# Altium PCB ArrayBoard.PcbDoc (part 1 of 2)
Units mm, origin at the board's own origin, x right, y up, seen from the top; angles counter-clockwise.
Board outline 84 x 84 mm, 4 copper layers (Top Copper, GND, VS, Bottom Copper), stack 1.97 mm thick; 132 components, 130 nets, 568 pads, 280 vias.
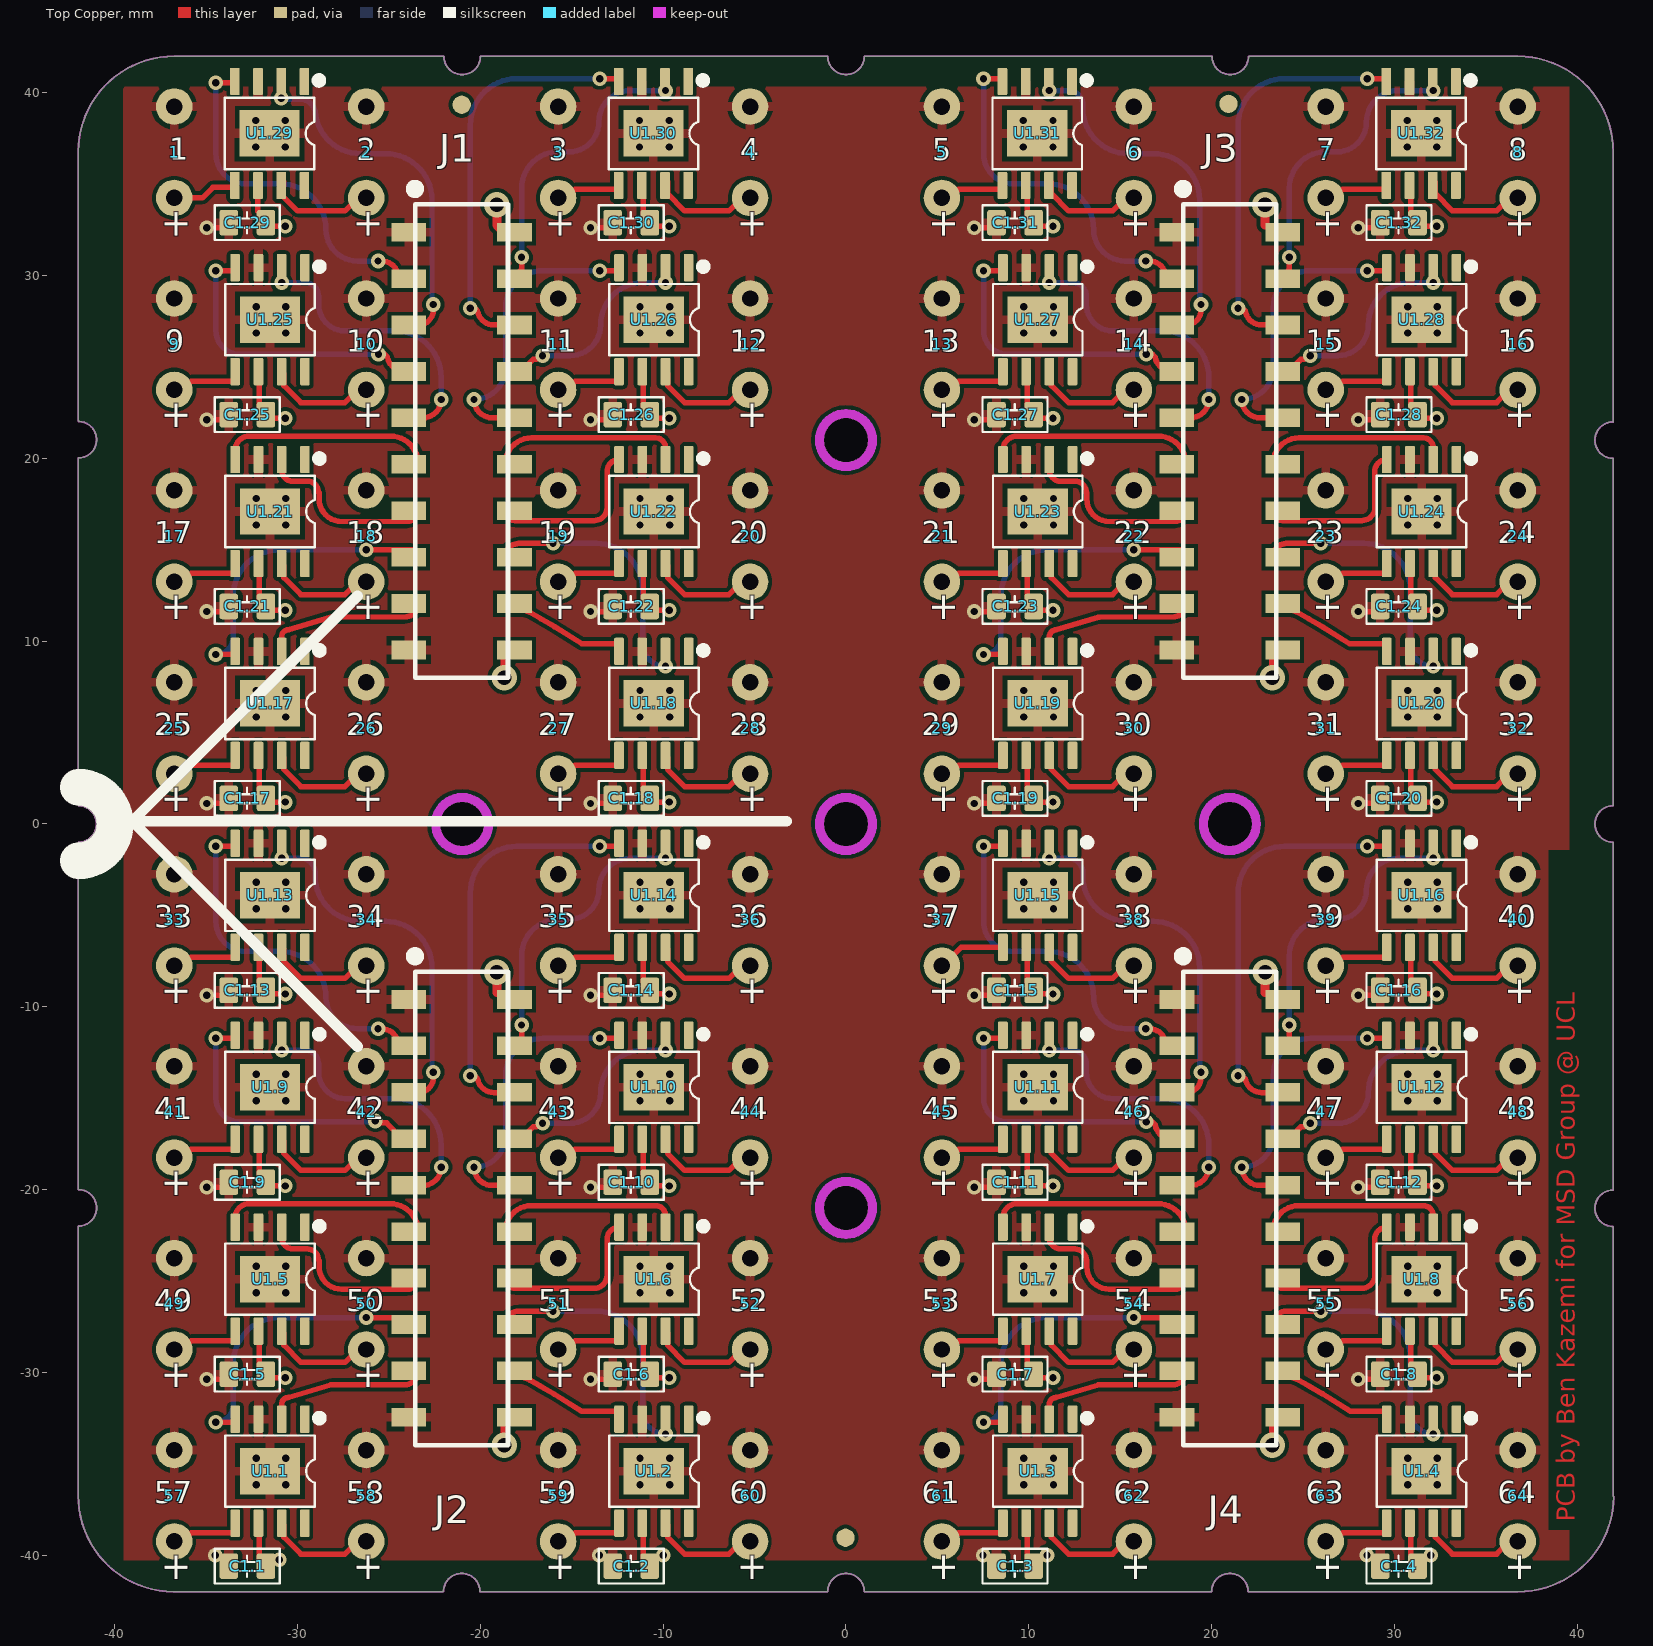
[diagram p0: Top Copper view]
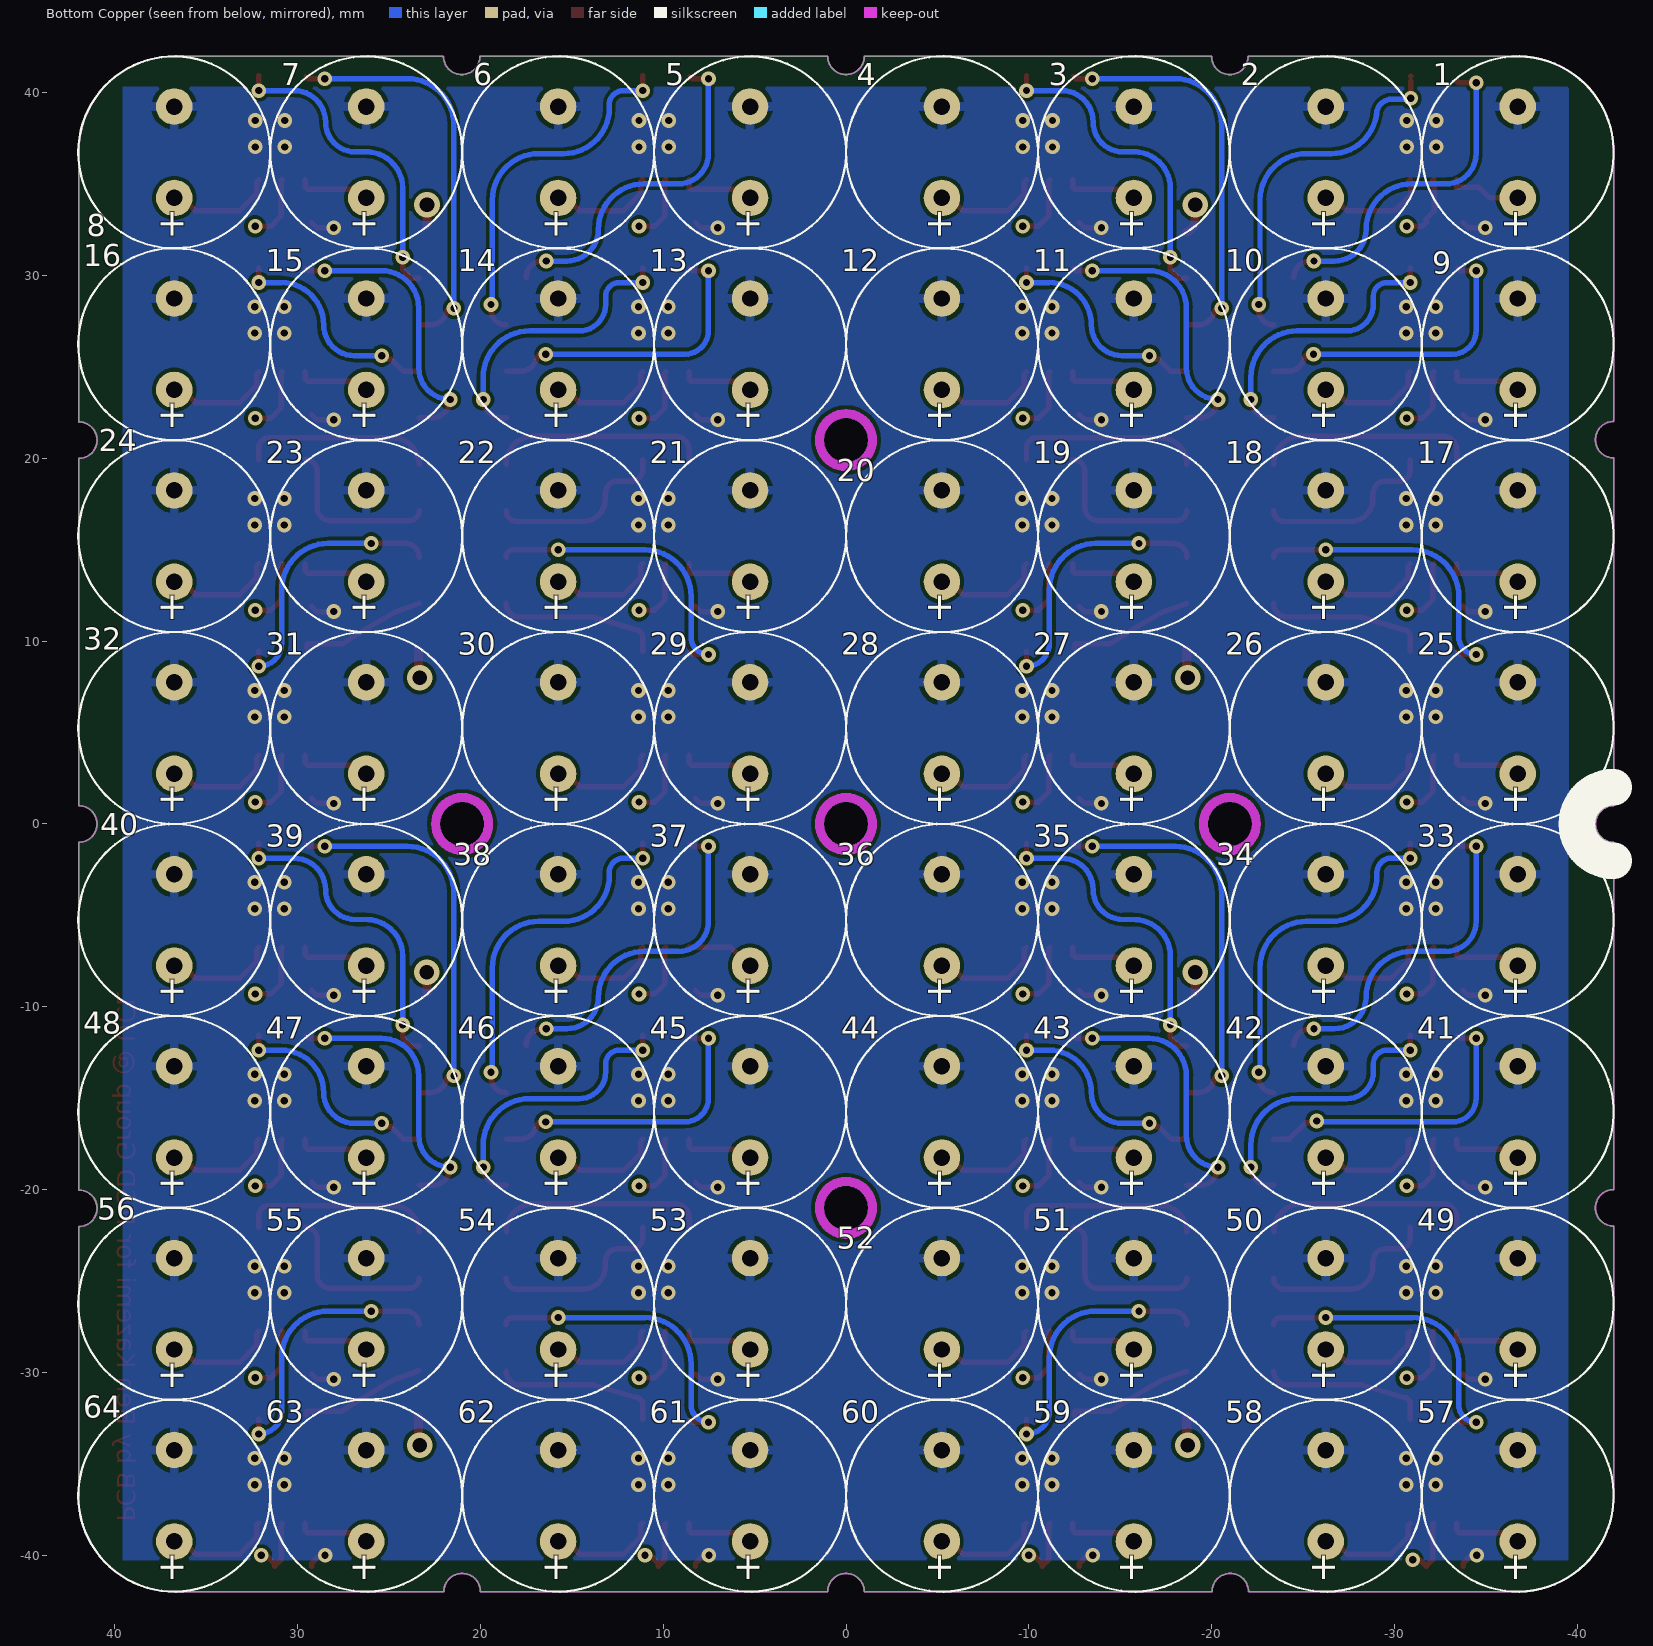
[diagram p1: Bottom Copper view, seen from below]
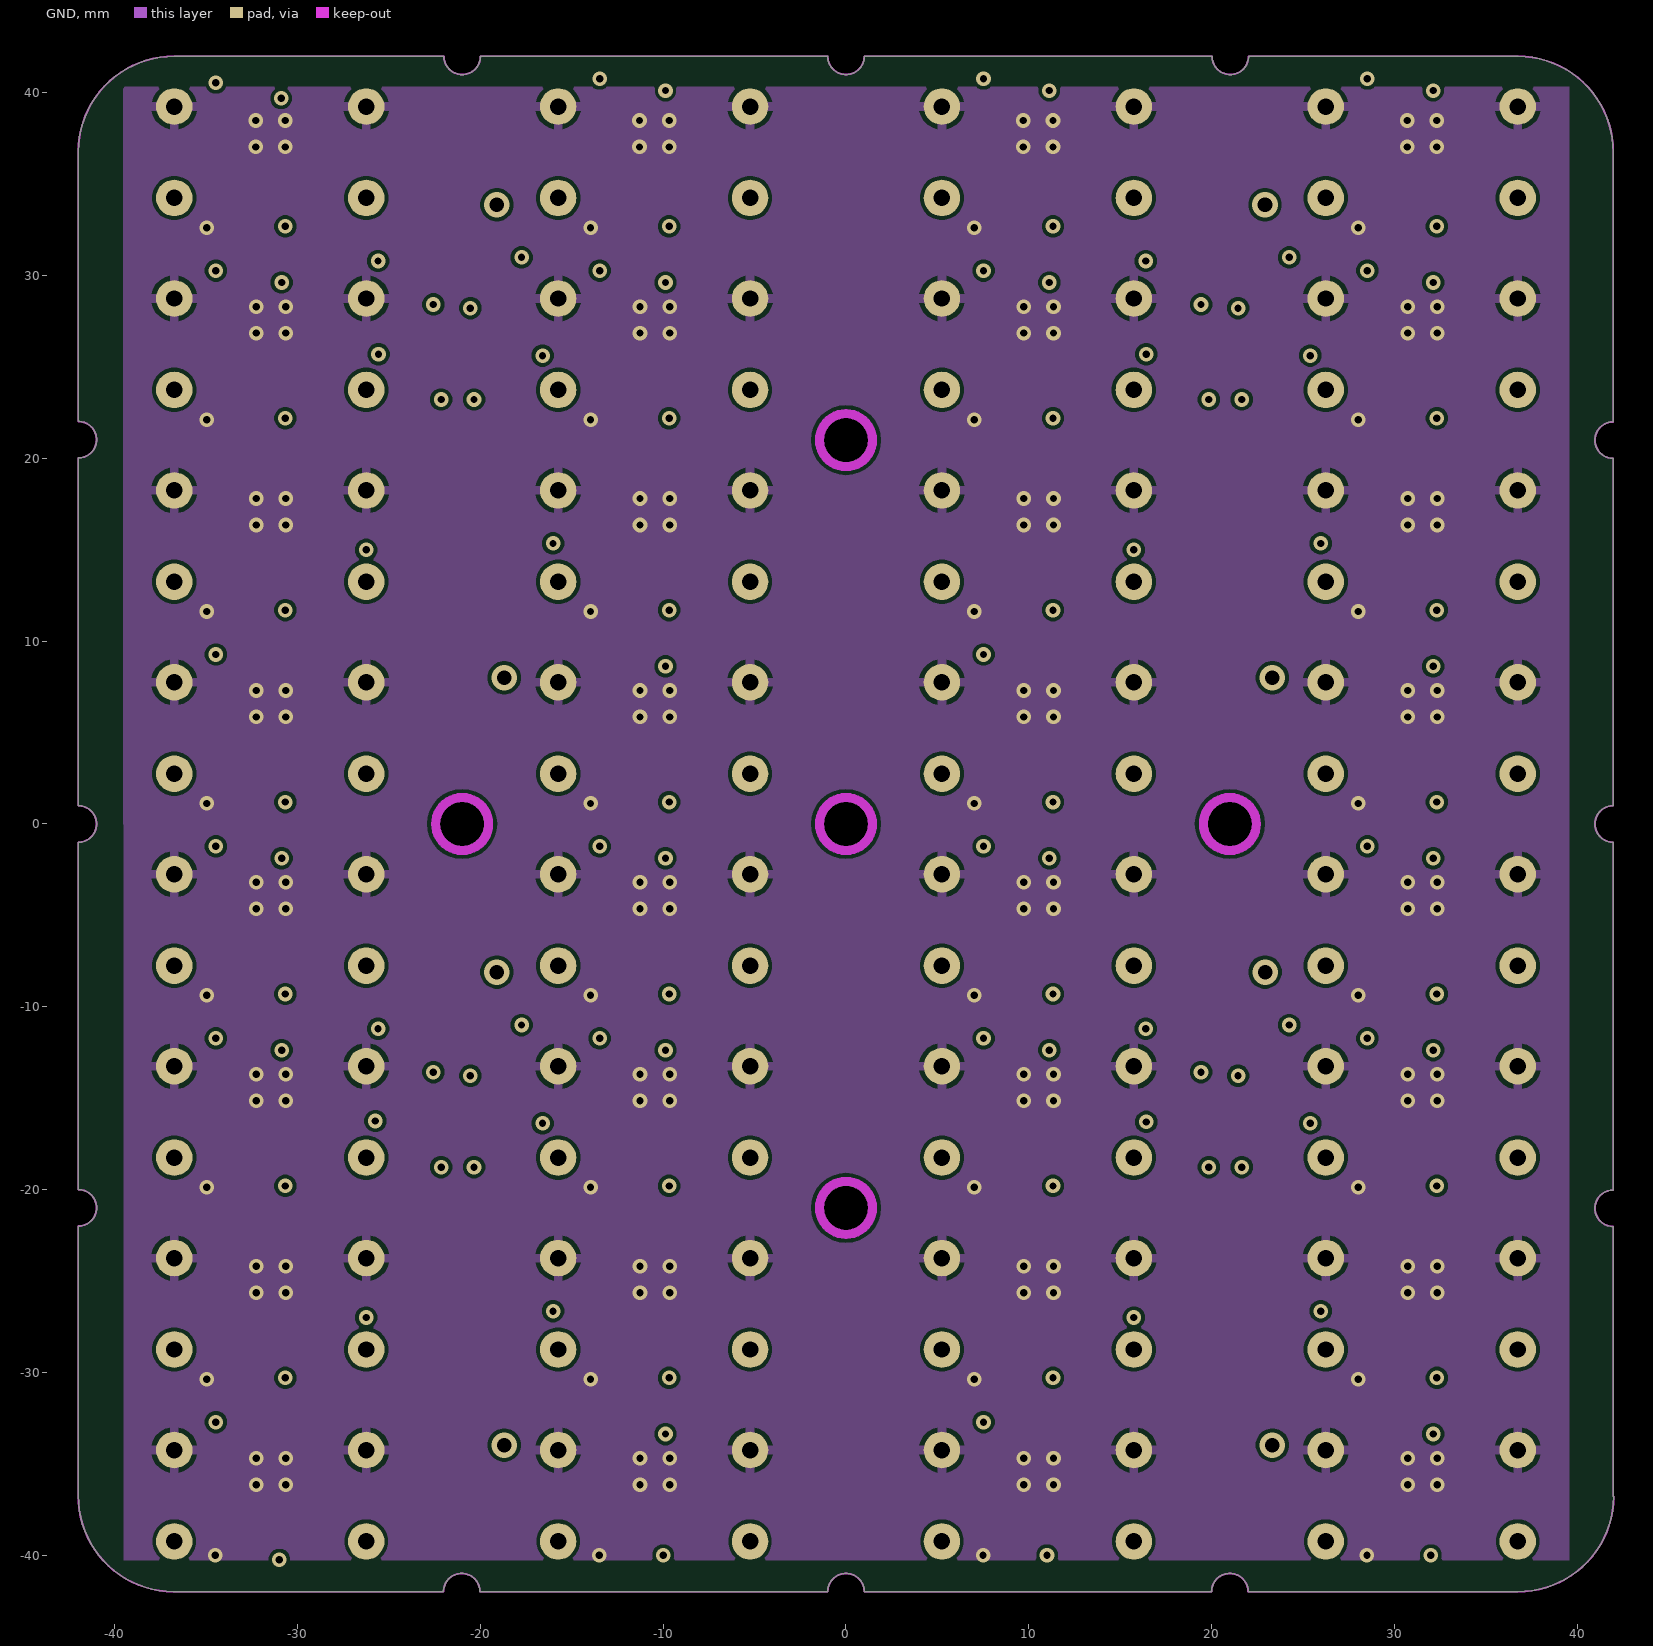
[diagram p2: GND]
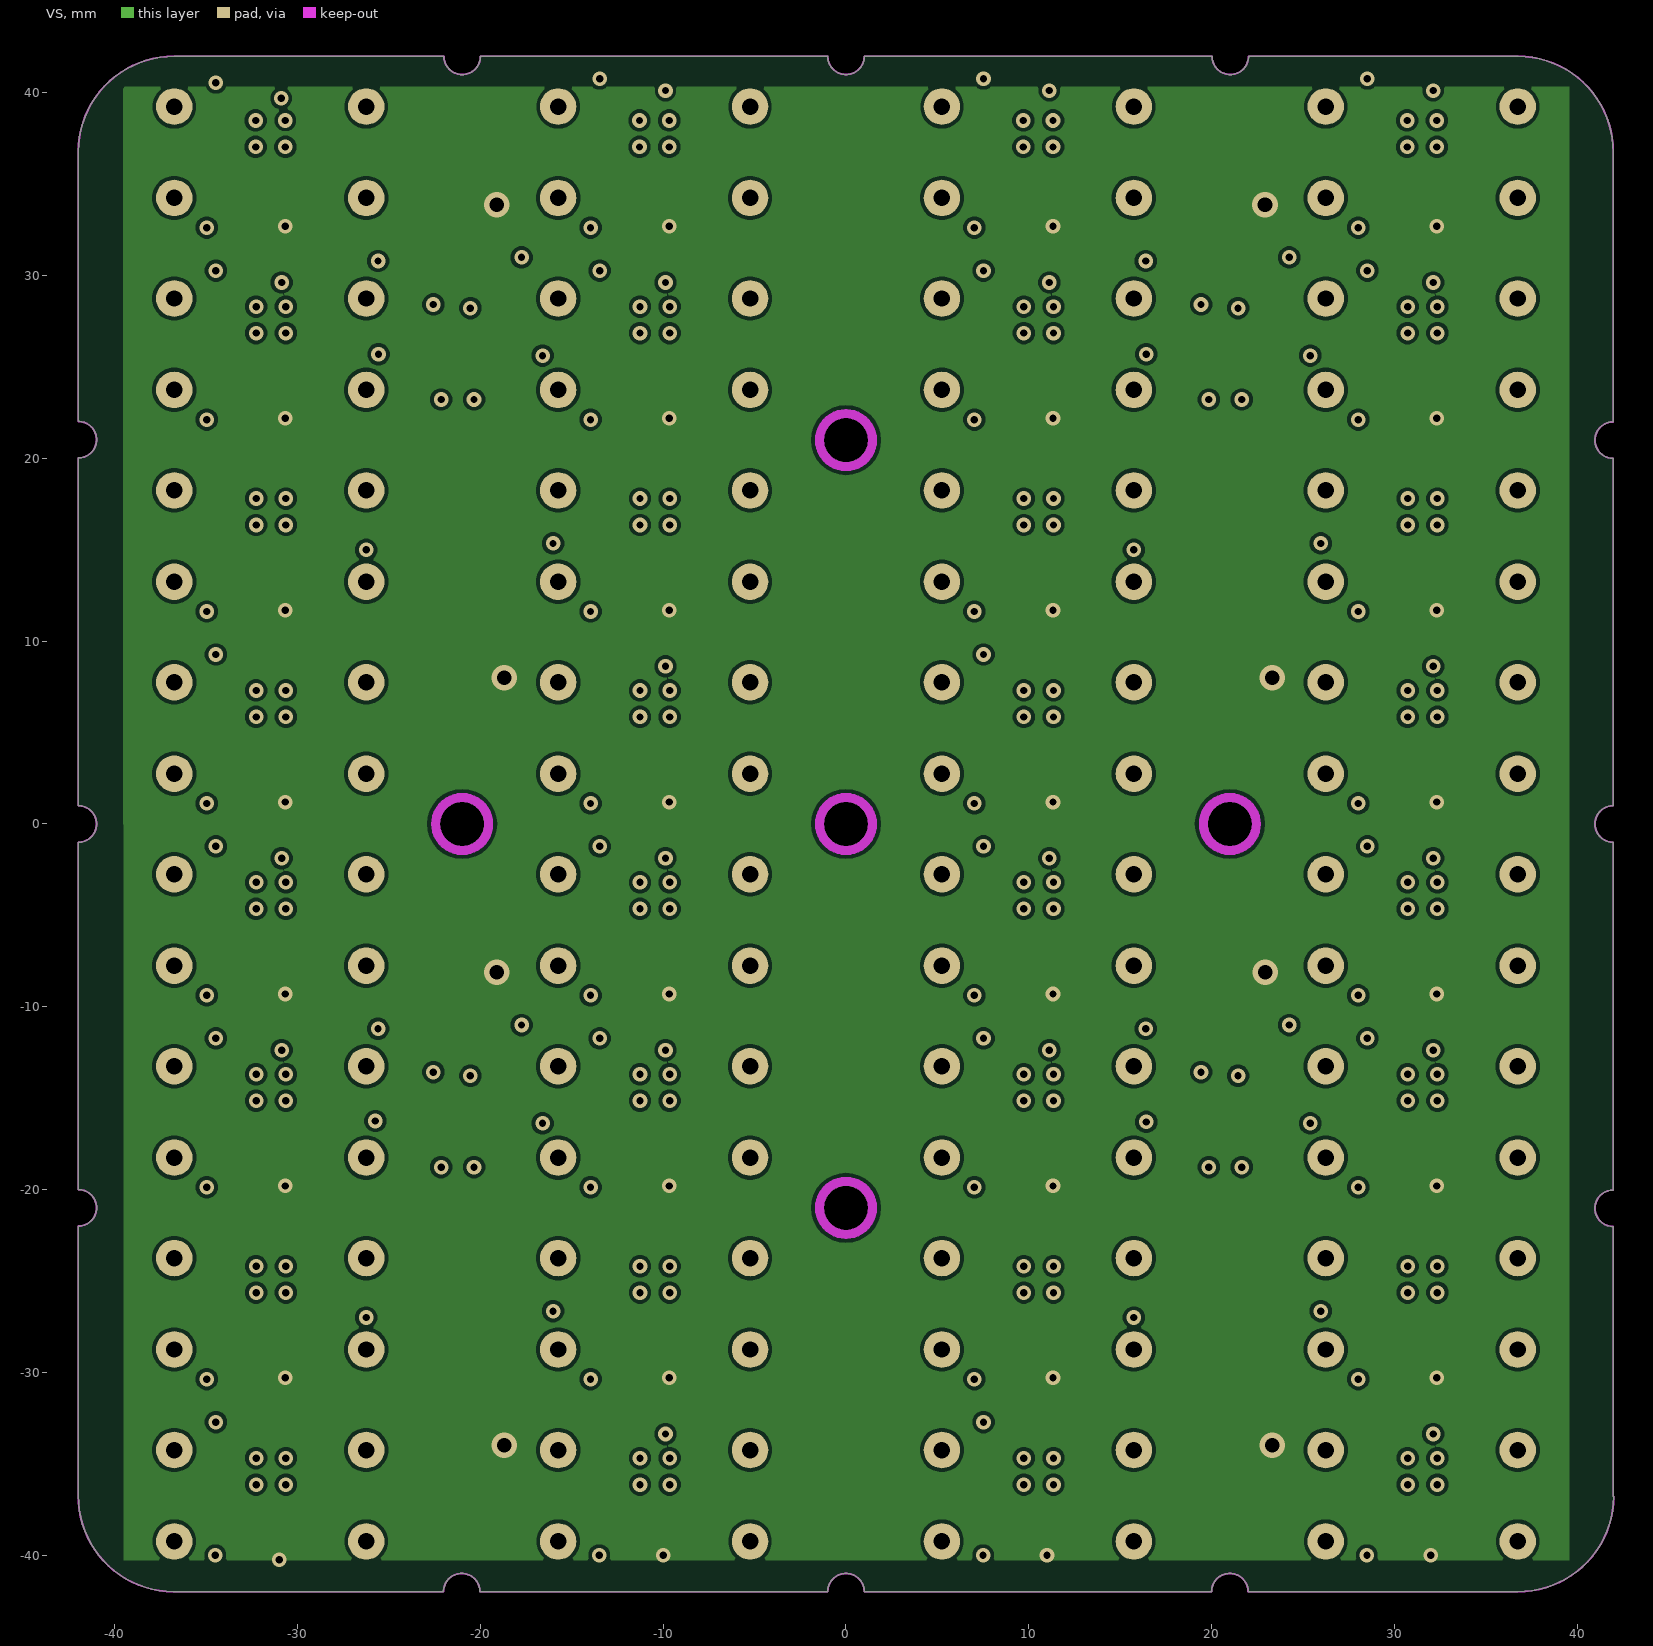
[diagram p3: VS]
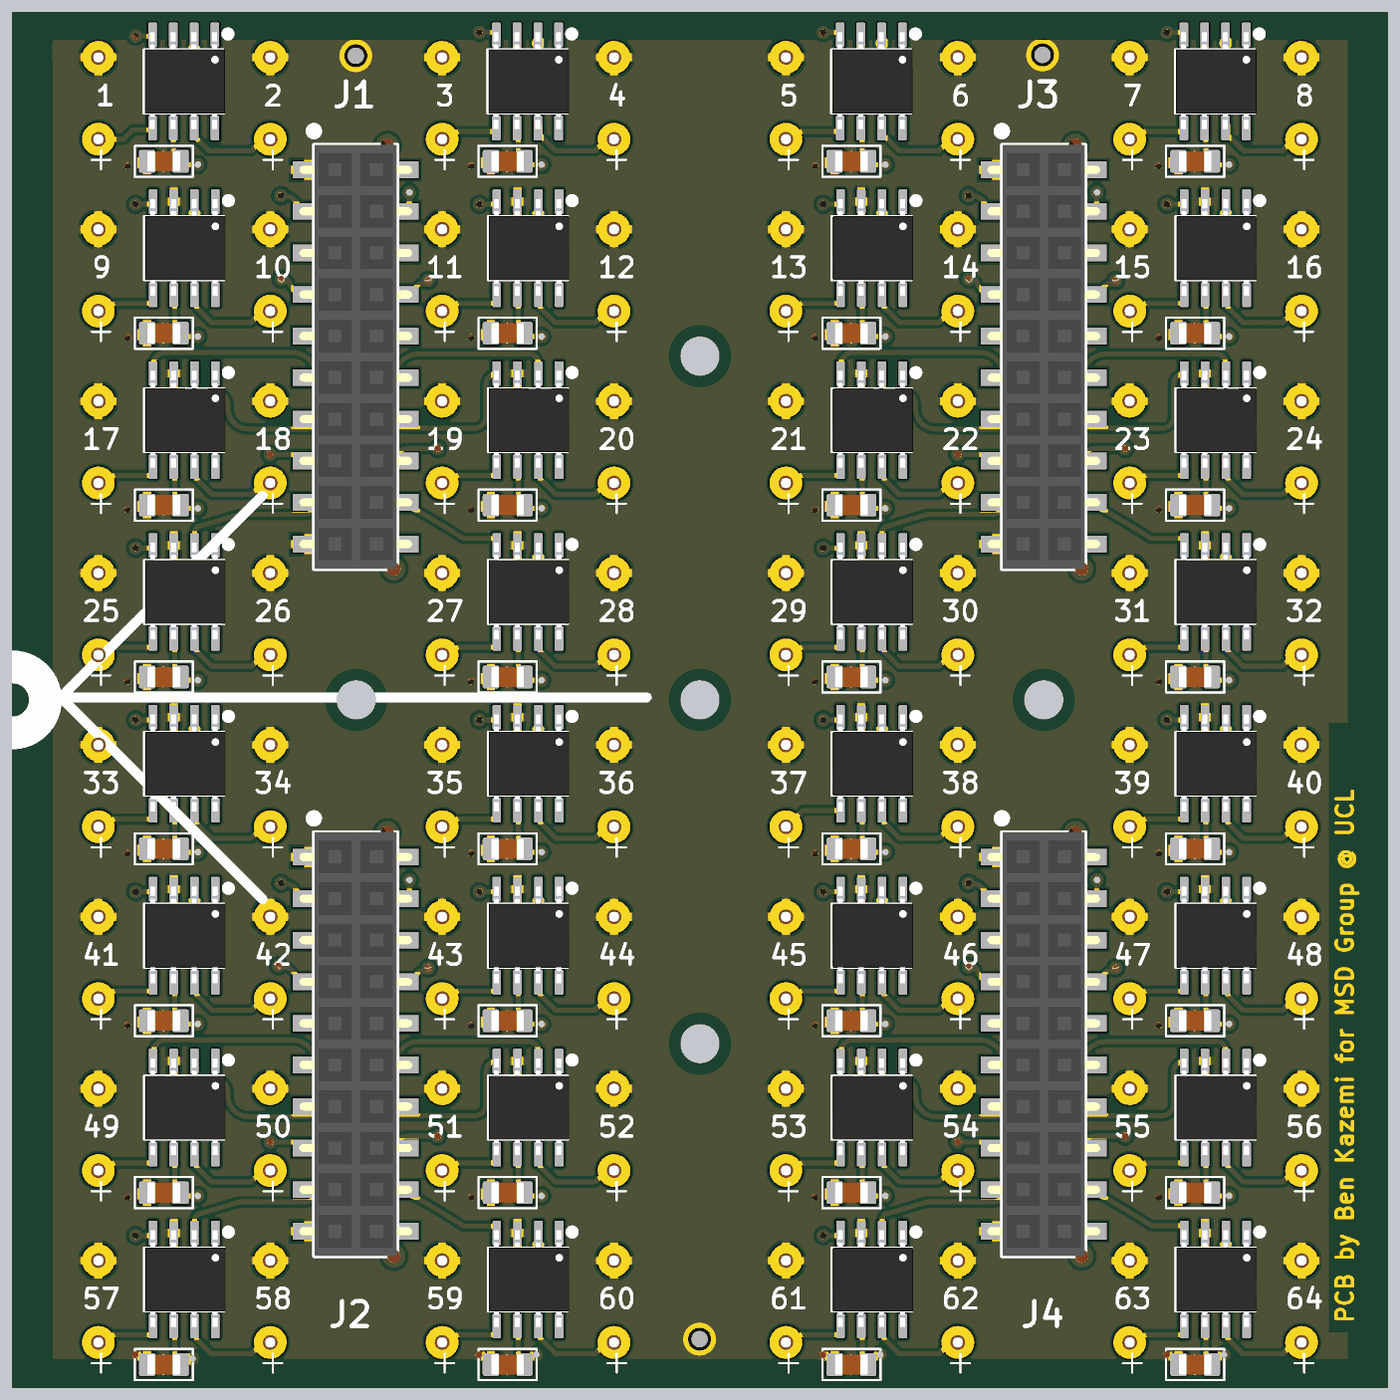
[diagram p5: 3D render of the assembled board from above, using the file's embedded part models]

## Layer stack, top to bottom
Top Mask: solder mask 0.015, Solder Resist, Dk 3.8
Top Copper: signal copper 0.035
Dielectric 1: prepreg 0.2, 7628, Dk 4.6
GND: signal copper 0.0175
Core: core 1.465, FR-4, Dk 4.5
VS: signal copper 0.0175
Dielectric 2: prepreg 0.2, 7628, Dk 4.6
Bottom Copper: signal copper 0.035
Bottom Mask: solder mask 0.015, Solder Resist, Dk 3.8

## Board outline
-42,-36.75 ccw(c-36.775,-36.775) -36.8,-42 -36.775,-42 -22.025,-42 cw(c-21.025,-42) -20.025,-42 -1,-42 cw(c0,-42) 1,-42 20,-42 cw(c21,-42) 22,-42 36.75,-42 ccw(c36.775,-36.775) 42,-36.8 41.975,-36.775 41.975,-22.025 cw(c41.975,-21.025) 41.975,-20.025 41.975,-1 cw(c41.975,0) 41.975,1 41.975,20 cw(c41.975,21) 41.975,22 41.975,36.75 ccw(c36.75,36.775) 36.775,42 22.025,42 cw(c21.025,42) 20.025,42 1,42 cw(c0,42) -1,42 -20,42 cw(c-21,42) -22,42 -36.75,42 ccw(c-36.775,36.775) -42,36.8 -42,36.775 -42,22.025 cw(c-42,21.025) -42,20.025 -42,1 cw(c-42,0) -42,-1 -42,-20 cw(c-42,-21) -42,-22

## Design rules (kind name [scope] priority, off if disabled: settings)
BoardOutlineClearance [All] p1: gap=0.2 ignorepadtopadclearanceinfootprint=FALSE
Clearance [All] p1: gap=0.2 ignorepadtopadclearanceinfootprint=FALSE except(0.09: Arc-Arc Arc-Track Track-Track; 0.127: SMDPad-SMDPad; 0.254: Arc-Via Arc-Text Track-Via Track-Text SMDPad-Via SMDPad-Text THPad-Via THPad-Text Via-Via Via-Text Fill-Text Poly-Text Region-Text Text-Text; 0.3: THPad-THPad; 0.33: Arc-THPad Track-THPad SMDPad-THPad)
HoleSize [All] p1: absolutevalues=TRUE maxlimit=6.3 minlimit=0.2 maxpercent=80.000 minpercent=20.000
MinimumAnnularRing [All] p1: minimumring=0.2
PlaneClearance [All] p1: clearance=0.5
PlaneConnect [All] p1: planeconnectstyle=Relief reliefexpansion=0.5 reliefentries=4 reliefconductorwidth=0.254 reliefairgap=0.254
PolygonConnect PolygonConnect_1 [All] p1: thpad.connectstyle=Relief thpad.reliefconductorwidth=0.5 thpad.reliefentries=4 thpad.polygonreliefangle="90 Angle" thpad.airgapwidth=0.254 smdpad.connectstyle=Relief smdpad.reliefconductorwidth=0.5 smdpad.reliefentries=4 smdpad.polygonreliefangle="90 Angle" smdpad.airgapwidth=0.254 via.connectstyle=Direct via.reliefconductorwidth=0.508 via.reliefentries=4 via.polygonreliefangle="90 Angle" via.airgapwidth=0.254
RoutingCorners [All] p1: cornerstyle=Round minsetback=2.54 maxsetback=2.54
RoutingVias [All] p1: holewidth=0.5 width=1 viastyle="Through Hole" minholewidth=0.2 minwidth=0.45 maxholewidth=1 maxwidth=2
SilkToSilkClearance [All] p1 off: silktosilkclearance=0.1
SilkToSolderMaskClearance [IsPad] p1 off: minsilkscreentomaskgap=0.1 clearancetoexposedcopper=TRUE
SolderMaskExpansion [All] p1: expansion=0.1 istentingtop=FALSE
Width [All] p1: maxlimit=2.54 minlimit=0.09 preferedwidth=0.3
24 further rules are at their usual default settings.

## Classes and differential pairs
net class J3_Nets: GND NetP3_20 sigA19 sigA20 sigA23 sigA24 sigA27 sigA28 sigA31 sigA32 sigB19 sigB20 sigB23 sigB24 sigB27 sigB28 sigB31 sigB32 VS
net class J1_Nets: GND NetP1_11 NetP1_20 sigA17 sigA18 sigA21 sigA22 sigA25 sigA26 sigA29 sigA30 sigB17 sigB18 sigB21 sigB22 sigB25 sigB26 sigB29 sigB30 VS
net class C1.32_Nets: GND VS
net class C1.31_Nets: GND VS
net class C1.30_Nets: GND VS
net class C1.29_Nets: GND VS
net class C1.28_Nets: GND VS
net class C1.27_Nets: GND VS
net class C1.26_Nets: GND VS
net class C1.25_Nets: GND VS
net class C1.24_Nets: GND VS
net class C1.23_Nets: GND VS
net class C1.22_Nets: GND VS
net class C1.21_Nets: GND VS
net class C1.20_Nets: GND VS
net class C1.19_Nets: GND VS
net class C1.18_Nets: GND VS
net class C1.17_Nets: GND VS
net class C1.16_Nets: GND VS
net class C1.15_Nets: GND VS
net class C1.14_Nets: GND VS
net class C1.13_Nets: GND VS
net class C1.10_Nets: GND VS
net class C1.9_Nets: GND VS
net class C1.8_Nets: GND VS
net class C1.7_Nets: GND VS
net class C1.6_Nets: GND VS
net class C1.5_Nets: GND VS
net class C1.4_Nets: GND VS
net class C1.3_Nets: GND VS
net class C1.2_Nets: GND VS
net class C1.1_Nets: GND VS
net class 7_Nets: GND Out2.32
net class 5_Nets: GND Out2.31
net class 3_Nets: GND Out2.30
net class 1_Nets: GND Out2.29
net class 15_Nets: GND Out2.28
net class 13_Nets: GND Out2.27
net class 11_Nets: GND Out2.26
net class 9_Nets: GND Out2.25
net class 23_Nets: GND Out2.24
net class 21_Nets: GND Out2.23
net class 19_Nets: GND Out2.22
net class 17_Nets: GND Out2.21
net class 31_Nets: GND Out2.20
net class 29_Nets: GND Out2.19
net class 27_Nets: GND Out2.18
net class 25_Nets: GND Out2.17
net class 39_Nets: GND Out2.16
net class 37_Nets: GND Out2.15
net class 35_Nets: GND Out2.14
net class 33_Nets: GND Out2.13
net class 47_Nets: GND Out2.12
net class 45_Nets: GND Out2.11
net class 43_Nets: GND Out2.10
net class 41_Nets: GND Out2.9
net class 55_Nets: GND Out2.8
net class 53_Nets: GND Out2.7
net class 51_Nets: GND Out2.6
net class 49_Nets: GND Out2.5
net class 63_Nets: GND Out2.4
net class 61_Nets: GND Out2.3
net class 59_Nets: GND Out2.2
net class 57_Nets: GND Out2.1
net class 8_Nets: GND Out1.32
net class 6_Nets: GND Out1.31
net class 4_Nets: GND Out1.30
net class 2_Nets: GND Out1.29
net class 16_Nets: GND Out1.28
net class 14_Nets: GND Out1.27
net class 12_Nets: GND Out1.26
net class 10_Nets: GND Out1.25
net class 24_Nets: GND Out1.24
net class 22_Nets: GND Out1.23
net class 20_Nets: GND Out1.22
net class 18_Nets: GND Out1.21
net class 32_Nets: GND Out1.20
net class 30_Nets: GND Out1.19
net class 28_Nets: GND Out1.18
net class 26_Nets: GND Out1.17
net class 40_Nets: GND Out1.16
net class 38_Nets: GND Out1.15
net class 36_Nets: GND Out1.14
net class 34_Nets: GND Out1.13
net class 48_Nets: GND Out1.12
net class 46_Nets: GND Out1.11
net class 44_Nets: GND Out1.10
net class 42_Nets: GND Out1.9
net class 56_Nets: GND Out1.8
net class 54_Nets: GND Out1.7
net class 52_Nets: GND Out1.6
net class 50_Nets: GND Out1.5
net class 64_Nets: GND Out1.4
net class 62_Nets: GND Out1.3
net class 60_Nets: GND Out1.2
net class 58_Nets: GND Out1.1
net class C1.12_Nets: GND VS
net class C1.11_Nets: GND VS
net class U1.32_Nets: GND Out1.32 Out2.32 sigA32 sigB32 VS
net class U1.31_Nets: GND Out1.31 Out2.31 sigA31 sigB31 VS
net class U1.30_Nets: GND Out1.30 Out2.30 sigA30 sigB30 VS
net class U1.29_Nets: GND Out1.29 Out2.29 sigA29 sigB29 VS
net class U1.28_Nets: GND Out1.28 Out2.28 sigA28 sigB28 VS
net class U1.27_Nets: GND Out1.27 Out2.27 sigA27 sigB27 VS
net class U1.26_Nets: GND Out1.26 Out2.26 sigA26 sigB26 VS
net class U1.25_Nets: GND Out1.25 Out2.25 sigA25 sigB25 VS
net class U1.24_Nets: GND Out1.24 Out2.24 sigA24 sigB24 VS
net class U1.23_Nets: GND Out1.23 Out2.23 sigA23 sigB23 VS
net class U1.22_Nets: GND Out1.22 Out2.22 sigA22 sigB22 VS
net class U1.21_Nets: GND Out1.21 Out2.21 sigA21 sigB21 VS
net class U1.20_Nets: GND Out1.20 Out2.20 sigA20 sigB20 VS
net class U1.19_Nets: GND Out1.19 Out2.19 sigA19 sigB19 VS
net class U1.18_Nets: GND Out1.18 Out2.18 sigA18 sigB18 VS
net class U1.17_Nets: GND Out1.17 Out2.17 sigA17 sigB17 VS
net class U1.16_Nets: GND Out1.16 Out2.16 sigA16 sigB16 VS
net class U1.15_Nets: GND Out1.15 Out2.15 sigA15 sigB15 VS
net class U1.14_Nets: GND Out1.14 Out2.14 sigA14 sigB14 VS
net class U1.13_Nets: GND Out1.13 Out2.13 sigA13 sigB13 VS
net class U1.12_Nets: GND Out1.12 Out2.12 sigA12 sigB12 VS
net class U1.11_Nets: GND Out1.11 Out2.11 sigA11 sigB11 VS
net class U1.10_Nets: GND Out1.10 Out2.10 sigA10 sigB10 VS
net class U1.9_Nets: GND Out1.9 Out2.9 sigA9 sigB9 VS
net class U1.8_Nets: GND Out1.8 Out2.8 sigA8 sigB8 VS
net class U1.7_Nets: GND Out1.7 Out2.7 sigA7 sigB7 VS
net class U1.6_Nets: GND Out1.6 Out2.6 sigA6 sigB6 VS
net class U1.5_Nets: GND Out1.5 Out2.5 sigA5 sigB5 VS
net class U1.4_Nets: GND Out1.4 Out2.4 sigA4 sigB4 VS
net class U1.3_Nets: GND Out1.3 Out2.3 sigA3 sigB3 VS
net class U1.2_Nets: GND Out1.2 Out2.2 sigA2 sigB2 VS
net class U1.1_Nets: GND Out1.1 Out2.1 sigA1 sigB1 VS
net class J4_Nets: GND sigA3 sigA4 sigA7 sigA8 sigA11 sigA12 sigA15 sigA16 sigB3 sigB4 sigB7 sigB8 sigB11 sigB12 sigB15 sigB16 VS
net class J2_Nets: GND sigA1 sigA2 sigA5 sigA6 sigA9 sigA10 sigA13 sigA14 sigB1 sigB2 sigB5 sigB6 sigB9 sigB10 sigB13 sigB14 VS
channel class AmplifyEmit: 1 2 3 4 5 6 7 8 9 10 11 12 13 14 15 16 17 18 19 20 21 22 23 24 25 26 27 28 29 30 31 32
net class sigB[1..32]: sigB1 sigB2 sigB3 sigB4 sigB5 sigB6 sigB7 sigB8 sigB9 sigB10 sigB11 sigB12 sigB13 sigB14 sigB15 sigB16 sigB17 sigB18 sigB19 sigB20 sigB21 sigB22 sigB23 sigB24 sigB25 sigB26 sigB27 sigB28 sigB29 sigB30 sigB31 sigB32
net class sigA[1..32]: sigA1 sigA2 sigA3 sigA4 sigA5 sigA6 sigA7 sigA8 sigA9 sigA10 sigA11 sigA12 sigA13 sigA14 sigA15 sigA16 sigA17 sigA18 sigA19 sigA20 sigA21 sigA22 sigA23 sigA24 sigA25 sigA26 sigA27 sigA28 sigA29 sigA30 sigA31 sigA32
component class 32: 7 8 C1.32 U1.32
component class 31: 5 6 C1.31 U1.31
component class 30: 3 4 C1.30 U1.30
component class 29: 1 2 C1.29 U1.29
component class 28: 15 16 C1.28 U1.28
component class 27: 13 14 C1.27 U1.27
component class 26: 11 12 C1.26 U1.26
component class 25: 9 10 C1.25 U1.25
component class 24: 23 24 C1.24 U1.24
component class 23: 21 22 C1.23 U1.23
component class 22: 19 20 C1.22 U1.22
component class 21: 17 18 C1.21 U1.21
component class 20: 31 32 C1.20 U1.20
component class 19: 29 30 C1.19 U1.19
component class 18: 27 28 C1.18 U1.18
component class 17: 25 26 C1.17 U1.17
component class 16: 39 40 C1.16 U1.16
component class 15: 37 38 C1.15 U1.15
component class 14: 35 36 C1.14 U1.14
component class 13: 33 34 C1.13 U1.13
component class 12: 47 48 C1.12 U1.12
component class 11: 45 46 C1.11 U1.11
component class 10: 43 44 C1.10 U1.10
component class 9: 41 42 C1.9 U1.9
component class ToBreakout: Header? J1 J2 J3 J4
component class 8: 55 56 C1.8 C?_S8 U1.8 U?_S8
component class 7: 53 54 C1.7 C?_S7 U1.7 U?_S7
component class 6: 51 52 C1.6 C?_S6 U1.6 U?_S6
component class 5: 49 50 C1.5 C?_S5 U1.5 U?_S5
component class 4: 63 64 C1.4 C?_S4 U1.4 U?_S4
component class 3: 61 62 C1.3 C?_S3 U1.3 U?_S3
component class 2: 59 60 C1.2 C?_S2 U1.2 U?_S2
component class 1: 57 58 C1.1 C?_S1 U1.1 U?_S1

## Components (designator, comment, footprint, x,y, rotation, side; value= is the part's Value field where it differs from the comment)
1 "EMIT" TRANSDUCER -36.75,36.75 r90 top (schematic designator 2)
2 "EMIT" TRANSDUCER -26.25,36.75 r90 top (schematic designator 1)
3 "EMIT" TRANSDUCER -15.75,36.75 r90 top (schematic designator 2)
4 "EMIT" TRANSDUCER -5.25,36.75 r90 top (schematic designator 1)
5 "EMIT" TRANSDUCER 5.25,36.75 r90 top (schematic designator 2)
6 "EMIT" TRANSDUCER 15.75,36.75 r90 top (schematic designator 1)
7 "EMIT" TRANSDUCER 26.25,36.75 r90 top (schematic designator 2)
8 "EMIT" TRANSDUCER 36.75,36.75 r90 top (schematic designator 1)
9 "EMIT" TRANSDUCER -36.75,26.25 r90 top (schematic designator 2)
10 "EMIT" TRANSDUCER -26.25,26.25 r90 top (schematic designator 1)
11 "EMIT" TRANSDUCER -15.75,26.25 r90 top (schematic designator 2)
12 "EMIT" TRANSDUCER -5.25,26.25 r90 top (schematic designator 1)
13 "EMIT" TRANSDUCER 5.25,26.25 r90 top (schematic designator 2)
14 "EMIT" TRANSDUCER 15.75,26.25 r90 top (schematic designator 1)
15 "EMIT" TRANSDUCER 26.25,26.25 r90 top (schematic designator 2)
16 "EMIT" TRANSDUCER 36.75,26.25 r90 top (schematic designator 1)
17 "EMIT" TRANSDUCER -36.75,15.75 r90 top (schematic designator 2)
18 "EMIT" TRANSDUCER -26.25,15.75 r90 top (schematic designator 1)
19 "EMIT" TRANSDUCER -15.75,15.75 r90 top (schematic designator 2)
20 "EMIT" TRANSDUCER -5.25,15.75 r90 top (schematic designator 1)
21 "EMIT" TRANSDUCER 5.25,15.75 r90 top (schematic designator 2)
22 "EMIT" TRANSDUCER 15.75,15.75 r90 top (schematic designator 1)
23 "EMIT" TRANSDUCER 26.25,15.75 r90 top (schematic designator 2)
24 "EMIT" TRANSDUCER 36.75,15.75 r90 top (schematic designator 1)
25 "EMIT" TRANSDUCER -36.75,5.25 r90 top (schematic designator 2)
26 "EMIT" TRANSDUCER -26.25,5.25 r90 top (schematic designator 1)
27 "EMIT" TRANSDUCER -15.75,5.25 r90 top (schematic designator 2)
28 "EMIT" TRANSDUCER -5.25,5.25 r90 top (schematic designator 1)
29 "EMIT" TRANSDUCER 5.25,5.25 r90 top (schematic designator 2)
30 "EMIT" TRANSDUCER 15.75,5.25 r90 top (schematic designator 1)
31 "EMIT" TRANSDUCER 26.25,5.25 r90 top (schematic designator 2)
32 "EMIT" TRANSDUCER 36.75,5.25 r90 top (schematic designator 1)
33 "EMIT" TRANSDUCER -36.75,-5.25 r90 top (schematic designator 2)
34 "EMIT" TRANSDUCER -26.25,-5.25 r90 top (schematic designator 1)
35 "EMIT" TRANSDUCER -15.75,-5.25 r90 top (schematic designator 2)
36 "EMIT" TRANSDUCER -5.25,-5.25 r90 top (schematic designator 1)
37 "EMIT" TRANSDUCER 5.25,-5.25 r90 top (schematic designator 2)
38 "EMIT" TRANSDUCER 15.75,-5.25 r90 top (schematic designator 1)
39 "EMIT" TRANSDUCER 26.25,-5.25 r90 top (schematic designator 2)
40 "EMIT" TRANSDUCER 36.75,-5.25 r90 top (schematic designator 1)
41 "EMIT" TRANSDUCER -36.75,-15.75 r90 top (schematic designator 2)
42 "EMIT" TRANSDUCER -26.25,-15.75 r90 top (schematic designator 1)
43 "EMIT" TRANSDUCER -15.75,-15.75 r90 top (schematic designator 2)
44 "EMIT" TRANSDUCER -5.25,-15.75 r90 top (schematic designator 1)
45 "EMIT" TRANSDUCER 5.25,-15.75 r90 top (schematic designator 2)
46 "EMIT" TRANSDUCER 15.75,-15.75 r90 top (schematic designator 1)
47 "EMIT" TRANSDUCER 26.25,-15.75 r90 top (schematic designator 2)
48 "EMIT" TRANSDUCER 36.75,-15.75 r90 top (schematic designator 1)
49 "EMIT" TRANSDUCER -36.75,-26.25 r90 top (schematic designator 2)
50 "EMIT" TRANSDUCER -26.25,-26.25 r90 top (schematic designator 1)
51 "EMIT" TRANSDUCER -15.75,-26.25 r90 top (schematic designator 2)
52 "EMIT" TRANSDUCER -5.25,-26.25 r90 top (schematic designator 1)
53 "EMIT" TRANSDUCER 5.25,-26.25 r90 top (schematic designator 2)
54 "EMIT" TRANSDUCER 15.75,-26.25 r90 top (schematic designator 1)
55 "EMIT" TRANSDUCER 26.25,-26.25 r90 top (schematic designator 2)
56 "EMIT" TRANSDUCER 36.75,-26.25 r90 top (schematic designator 1)
57 "EMIT" TRANSDUCER -36.75,-36.75 r90 top (schematic designator 2)
58 "EMIT" TRANSDUCER -26.25,-36.75 r90 top (schematic designator 1)
59 "EMIT" TRANSDUCER -15.75,-36.75 r90 top (schematic designator 2)
60 "EMIT" TRANSDUCER -5.25,-36.75 r90 top (schematic designator 1)
61 "EMIT" TRANSDUCER 5.25,-36.75 r90 top (schematic designator 2)
62 "EMIT" TRANSDUCER 15.75,-36.75 r90 top (schematic designator 1)
63 "EMIT" TRANSDUCER 26.25,-36.75 r90 top (schematic designator 2)
64 "EMIT" TRANSDUCER 36.75,-36.75 r90 top (schematic designator 1)
C1.1 "0.1 uF" "CAP0805 - CERAMIC" -32.75,-40.6 r270 top (schematic designator C1)
C1.2 "0.1 uF" "CAP0805 - CERAMIC" -11.75,-40.6 r270 top (schematic designator C1)
C1.3 "0.1 uF" "CAP0805 - CERAMIC" 9.25,-40.6 r270 top (schematic designator C1)
C1.4 "0.1 uF" "CAP0805 - CERAMIC" 30.25,-40.6 r270 top (schematic designator C1)
C1.5 "0.1 uF" "CAP0805 - CERAMIC" -32.75,-30.1 r270 top (schematic designator C1)
C1.6 "0.1 uF" "CAP0805 - CERAMIC" -11.75,-30.1 r270 top (schematic designator C1)
C1.7 "0.1 uF" "CAP0805 - CERAMIC" 9.25,-30.1 r270 top (schematic designator C1)
C1.8 "0.1 uF" "CAP0805 - CERAMIC" 30.25,-30.1 r270 top (schematic designator C1)
C1.9 "0.1 uF" "CAP0805 - CERAMIC" -32.75,-19.6 r270 top (schematic designator C1)
C1.10 "0.1 uF" "CAP0805 - CERAMIC" -11.75,-19.6 r270 top (schematic designator C1)
C1.11 "0.1 uF" "CAP0805 - CERAMIC" 9.25,-19.6 r270 top (schematic designator C1)
C1.12 "0.1 uF" "CAP0805 - CERAMIC" 30.25,-19.6 r270 top (schematic designator C1)
C1.13 "0.1 uF" "CAP0805 - CERAMIC" -32.75,-9.1 r270 top (schematic designator C1)
C1.14 "0.1 uF" "CAP0805 - CERAMIC" -11.75,-9.1 r270 top (schematic designator C1)
C1.15 "0.1 uF" "CAP0805 - CERAMIC" 9.25,-9.1 r270 top (schematic designator C1)
C1.16 "0.1 uF" "CAP0805 - CERAMIC" 30.25,-9.1 r270 top (schematic designator C1)
C1.17 "0.1 uF" "CAP0805 - CERAMIC" -32.75,1.4 r270 top (schematic designator C1)
C1.18 "0.1 uF" "CAP0805 - CERAMIC" -11.75,1.4 r270 top (schematic designator C1)
C1.19 "0.1 uF" "CAP0805 - CERAMIC" 9.25,1.4 r270 top (schematic designator C1)
C1.20 "0.1 uF" "CAP0805 - CERAMIC" 30.25,1.4 r270 top (schematic designator C1)
C1.21 "0.1 uF" "CAP0805 - CERAMIC" -32.75,11.9 r270 top (schematic designator C1)
C1.22 "0.1 uF" "CAP0805 - CERAMIC" -11.75,11.9 r270 top (schematic designator C1)
C1.23 "0.1 uF" "CAP0805 - CERAMIC" 9.25,11.9 r270 top (schematic designator C1)
C1.24 "0.1 uF" "CAP0805 - CERAMIC" 30.25,11.9 r270 top (schematic designator C1)
C1.25 "0.1 uF" "CAP0805 - CERAMIC" -32.75,22.4 r270 top (schematic designator C1)
C1.26 "0.1 uF" "CAP0805 - CERAMIC" -11.75,22.4 r270 top (schematic designator C1)
C1.27 "0.1 uF" "CAP0805 - CERAMIC" 9.25,22.4 r270 top (schematic designator C1)
C1.28 "0.1 uF" "CAP0805 - CERAMIC" 30.25,22.4 r270 top (schematic designator C1)
C1.29 "0.1 uF" "CAP0805 - CERAMIC" -32.75,32.9 r270 top (schematic designator C1)
C1.30 "0.1 uF" "CAP0805 - CERAMIC" -11.75,32.9 r270 top (schematic designator C1)
C1.31 "0.1 uF" "CAP0805 - CERAMIC" 9.25,32.9 r270 top (schematic designator C1)
C1.32 "0.1 uF" "CAP0805 - CERAMIC" 30.25,32.9 r270 top (schematic designator C1)
J1 "B27c-2x10-BSAB1-G" "B27C SMT2X10" -21.024,20.255 r270 top locked
J2 "B27c-2x10-BSAB1-G" "B27C SMT2X10" -21.024,-21.725 r270 top locked
J3 "B27c-2x10-BSAB1-G" "B27C SMT2X10" 21.001,20.255 r270 top locked
J4 "B27c-2x10-BSAB1-G" "B27C SMT2X10" 21.003,-21.725 r270 top locked
U1.1 "MOSFET Driver" MIC4127YME -31.51,-35.405 r270 top (schematic designator U1)
U1.2 "MOSFET Driver" MIC4127YME -10.51,-35.405 r270 top (schematic designator U1)
U1.3 "MOSFET Driver" MIC4127YME 10.49,-35.405 r270 top (schematic designator U1)
U1.4 "MOSFET Driver" MIC4127YME 31.49,-35.405 r270 top (schematic designator U1)
U1.5 "MOSFET Driver" MIC4127YME -31.51,-24.905 r270 top (schematic designator U1)
U1.6 "MOSFET Driver" MIC4127YME -10.51,-24.905 r270 top (schematic designator U1)
U1.7 "MOSFET Driver" MIC4127YME 10.49,-24.905 r270 top (schematic designator U1)
U1.8 "MOSFET Driver" MIC4127YME 31.49,-24.905 r270 top (schematic designator U1)
U1.9 "MOSFET Driver" MIC4127YME -31.51,-14.405 r270 top (schematic designator U1)
U1.10 "MOSFET Driver" MIC4127YME -10.51,-14.405 r270 top (schematic designator U1)
U1.11 "MOSFET Driver" MIC4127YME 10.49,-14.405 r270 top (schematic designator U1)
U1.12 "MOSFET Driver" MIC4127YME 31.49,-14.405 r270 top (schematic designator U1)
U1.13 "MOSFET Driver" MIC4127YME -31.51,-3.905 r270 top (schematic designator U1)
U1.14 "MOSFET Driver" MIC4127YME -10.51,-3.905 r270 top (schematic designator U1)
U1.15 "MOSFET Driver" MIC4127YME 10.49,-3.905 r270 top (schematic designator U1)
U1.16 "MOSFET Driver" MIC4127YME 31.49,-3.905 r270 top (schematic designator U1)
U1.17 "MOSFET Driver" MIC4127YME -31.51,6.595 r270 top (schematic designator U1)
U1.18 "MOSFET Driver" MIC4127YME -10.51,6.595 r270 top (schematic designator U1)
U1.19 "MOSFET Driver" MIC4127YME 10.49,6.595 r270 top (schematic designator U1)
U1.20 "MOSFET Driver" MIC4127YME 31.49,6.595 r270 top (schematic designator U1)
U1.21 "MOSFET Driver" MIC4127YME -31.51,17.095 r270 top (schematic designator U1)
U1.22 "MOSFET Driver" MIC4127YME -10.51,17.095 r270 top (schematic designator U1)
U1.23 "MOSFET Driver" MIC4127YME 10.49,17.095 r270 top (schematic designator U1)
U1.24 "MOSFET Driver" MIC4127YME 31.49,17.095 r270 top (schematic designator U1)
U1.25 "MOSFET Driver" MIC4127YME -31.51,27.595 r270 top (schematic designator U1)
U1.26 "MOSFET Driver" MIC4127YME -10.51,27.595 r270 top (schematic designator U1)
U1.27 "MOSFET Driver" MIC4127YME 10.49,27.595 r270 top (schematic designator U1)
U1.28 "MOSFET Driver" MIC4127YME 31.49,27.595 r270 top (schematic designator U1)
U1.29 "MOSFET Driver" MIC4127YME -31.536,37.779 r270 top (schematic designator U1)
U1.30 "MOSFET Driver" MIC4127YME -10.536,37.779 r270 top (schematic designator U1)
U1.31 "MOSFET Driver" MIC4127YME 10.464,37.779 r270 top (schematic designator U1)
U1.32 "MOSFET Driver" MIC4127YME 31.464,37.779 r270 top (schematic designator U1)

## Footprints (in the part's own frame and the unit in brackets; to place one, negate y for a bottom-side part, rotate by r counter-clockwise, add the part's x,y. Pads: shape width x height; smd on the part's side, far side on the other; paste and mask are expansions set on the pad)
"B27C SMT2X10" [mm]
  rect 1.02x1.9 smd: 01(-12.125,-2.9) 02(-12.125,2.887) 03(-9.585,-2.9) 04(-9.585,2.887) 05(-7.045,-2.9) 06(-7.045,2.887) 07(-4.505,-2.9) 08(-4.505,2.887) 09(-1.965,-2.9) 10(-1.965,2.887) 11(0.575,-2.9) 12(0.575,2.887) 13(3.115,-2.9) 14(3.115,2.887) 15(5.655,-2.9) 16(5.655,2.887) 17(8.195,-2.9) 18(8.195,2.887) 19(10.735,-2.9) 20(10.735,2.887)
  silkscreen extent -14.69,-2.76 12.25,2.53, body extent -13.65,-3.45 12.25,3.45, height 7.4
"CAP0805 - CERAMIC" [mil]
  rrect25% 55x40 smd: 1(0,40) 2(0,-40)
  silkscreen extent -38,-70 37,70, body extent -25,-39 25,39, height 49
MIC4127YME [mm]
  rrect25% 1.5x0.53 smd: 1(-2.845,1.905) 2(-2.845,0.635) 3(-2.845,-0.635) 4(-2.845,-1.905) 5(2.845,-1.905) 6(2.845,-0.635) 7(2.845,0.635) 8(2.845,1.905)
  rect 2.54x3.3 smd paste-5: 3(0,0)
  silkscreen extent -3.1,-2.45 1.95,2.9, body extent -3,-2.37 2.9,2.52, height 1.38
TRANSDUCER [mm]
  round 2 hole 0.9: +(-2.5,0) -(2.5,0)
  body extent -4.95,-4.95 4.95,4.94, height 0.7

## Part data
C1.1 C1.2 C1.3 C1.4 C1.5 C1.6 C1.7 C1.8 C1.9 C1.10 C1.11 C1.12 C1.13 C1.14 C1.15 C1.16 C1.17 C1.18 C1.19 C1.20 C1.21 C1.22 C1.23 C1.24 C1.25 C1.26 C1.27 C1.28 C1.29 C1.30 C1.31 C1.32: library part "CAP CERAMIC"
J1 J2 J3 J4: Package=None, Availability=Unavailable, MP=B27c-2x10-BSAB1-G, Price=None
U1.1 U1.2 U1.3 U1.4 U1.5 U1.6 U1.7 U1.8 U1.9 U1.10 U1.11 U1.12 U1.13 U1.14 U1.15 U1.16 U1.17 U1.18 U1.19 U1.20 U1.21 U1.22 U1.23 U1.24 U1.25 U1.26 U1.27 U1.28 U1.29 U1.30 U1.31 U1.32: library part MIC4127

## Free pads (board coordinates)
  round 2.4 hole 2.4 unplated mask+0: 0(-21,0) 0(0,-21) 0(0,0) 0(0,21) 0(21,0)
  round 1 smd paste+0 mask+0.5: 1(-21.025,39.35) 1(-0.025,-39.05) 1(20.925,39.4)

## Via types
v1: diameter 0.8, hole 0.4, Top Copper to Bottom Copper, tented both sides, 144 vias
v2: diameter 0.8, hole 0.4, Top Copper to Bottom Copper, tented bottom, 128 vias
v3: diameter 1.4, hole 0.8, Top Copper to Bottom Copper, tented both sides, 8 vias

## Nets (pads, with @x,y where several pads share a name; then routed paths per layer and width w, separated by ;. In a path a pad name is that pad's centre, name@x,y a point inside that pad or via, vN(x,y) a via of type N, cw(c..) or ccw(c..) an arc to the next point about the centre after c; other vN are vias at no path point)
GND: 1.- 2.- 3.- 4.- 5.- 6.- 7.- 8.- 9.- 10.- 11.- 12.- 13.- 14.- 15.- 16.- 17.- 18.- 19.- 20.- 21.- 22.- 23.- 24.- 25.- 26.- 27.- 28.- 29.- 30.- 31.- 32.- 33.- 34.- 35.- 36.- 37.- 38.- 39.- 40.- 41.- 42.- 43.- 44.- 45.- 46.- 47.- 48.- 49.- 50.- 51.- 52.- 53.- 54.- 55.- 56.- 57.- 58.- 59.- 60.- 61.- 62.- 63.- 64.- C1.1.2 C1.2.2 C1.3.2 C1.4.2 C1.5.2 C1.6.2 C1.7.2 C1.8.2 C1.9.2 C1.10.2 C1.11.2 C1.12.2 C1.13.2 C1.14.2 C1.15.2 C1.16.2 C1.17.2 C1.18.2 C1.19.2 C1.20.2 C1.21.2 C1.22.2 C1.23.2 C1.24.2 C1.25.2 C1.26.2 C1.27.2 C1.28.2 C1.29.2 C1.30.2 C1.31.2 C1.32.2 J1.01 J1.19 J2.01 J2.19 J3.01 J3.19 J4.01 J4.19 U1.1.3 U1.2.3 U1.3.3 U1.4.3 U1.5.3 U1.6.3 U1.7.3 U1.8.3 U1.9.3 U1.10.3 U1.11.3 U1.12.3 U1.13.3 U1.14.3 U1.15.3 U1.16.3 U1.17.3 U1.18.3 U1.19.3 U1.20.3 U1.21.3 U1.22.3 U1.23.3 U1.24.3 U1.25.3 U1.26.3 U1.27.3 U1.28.3 U1.29.3 U1.30.3 U1.31.3 U1.32.3 | length 41.3
  Top Copper w0.3: v1(-34.975,-30.375) -34.041,-30.375 C1.5.2@-33.766,-30.1 ; v1(-34.975,-19.875) -34.041,-19.875 C1.9.2@-33.766,-19.6 ; v1(-34.975,-9.375) -34.041,-9.375 C1.13.2@-33.766,-9.1 ; v1(-34.975,1.125) -34.041,1.125 C1.17.2@-33.766,1.4 ; v1(-34.975,11.625) -34.041,11.625 C1.21.2@-33.766,11.9 ; v1(-34.975,22.125) -34.041,22.125 C1.25.2@-33.766,22.4 ; v1(-34.975,32.625) -34.041,32.625 C1.29.2@-33.766,32.9 ; v1(-34.5,-40) -34.411,-40.089 -34.124,-40.089 -33.766,-40.447 C1.1.2@-33.766,-40.6 ; v1(-13.975,-30.375) -13.041,-30.375 C1.6.2@-12.766,-30.1 ; v1(-13.975,-19.875) -13.041,-19.875 C1.10.2@-12.766,-19.6 ; v1(-13.975,-9.375) -13.041,-9.375 C1.14.2@-12.766,-9.1 ; v1(-13.975,1.125) -13.041,1.125 C1.18.2@-12.766,1.4 ; v1(-13.975,11.625) -13.041,11.625 C1.22.2@-12.766,11.9 ; v1(-13.975,22.125) -13.041,22.125 C1.26.2@-12.766,22.4 ; v1(-13.975,32.625) -13.041,32.625 C1.30.2@-12.766,32.9 ; v1(-13.5,-40) -13.411,-40.089 -13.124,-40.089 -12.766,-40.447 C1.2.2@-12.766,-40.6 ; v1(7.025,-30.375) 7.959,-30.375 C1.7.2@8.234,-30.1 ; v1(7.025,-19.875) 7.959,-19.875 C1.11.2@8.234,-19.6 ; v1(7.025,-9.375) 7.959,-9.375 C1.15.2@8.234,-9.1 ; v1(7.025,1.125) 7.959,1.125 C1.19.2@8.234,1.4 ; v1(7.025,11.625) 7.959,11.625 C1.23.2@8.234,11.9 ; v1(7.025,22.125) 7.959,22.125 C1.27.2@8.234,22.4 ; v1(7.025,32.625) 7.959,32.625 C1.31.2@8.234,32.9 ; v1(7.5,-40) 7.589,-40.089 7.876,-40.089 8.234,-40.447 C1.3.2@8.234,-40.6 ; v1(28.025,-30.375) 28.959,-30.375 C1.8.2@29.234,-30.1 ; v1(28.025,-19.875) 28.959,-19.875 C1.12.2@29.234,-19.6 ; v1(28.025,-9.375) 28.959,-9.375 C1.16.2@29.234,-9.1 ; v1(28.025,1.125) 28.959,1.125 C1.20.2@29.234,1.4 ; v1(28.025,11.625) 28.959,11.625 C1.24.2@29.234,11.9 ; v1(28.025,22.125) 28.959,22.125 C1.28.2@29.234,22.4 ; v1(28.025,32.625) 28.959,32.625 C1.32.2@29.234,32.9 ; v1(28.5,-40) 28.589,-40.089 28.876,-40.089 29.234,-40.447 C1.4.2@29.234,-40.6
  other v2: -32.272,-36.142 -30.646,-36.142 -11.272,-36.142 -9.646,-36.142 9.728,-36.142 11.354,-36.142 30.728,-36.142 32.354,-36.142 -32.272,-34.694 -30.646,-34.694 -11.272,-34.694 -9.646,-34.694 9.728,-34.694 11.354,-34.694 30.728,-34.694 32.354,-34.694 -32.272,-25.642 -30.646,-25.642 -11.272,-25.642 -9.646,-25.642 9.728,-25.642 11.354,-25.642 30.728,-25.642 32.354,-25.642 -32.272,-24.194 -30.646,-24.194 -11.272,-24.194 -9.646,-24.194 9.728,-24.194 11.354,-24.194 30.728,-24.194 32.354,-24.194 -32.272,-15.142 -30.646,-15.142 -11.272,-15.142 -9.646,-15.142 9.728,-15.142 11.354,-15.142 30.728,-15.142 32.354,-15.142 -32.272,-13.694 -30.646,-13.694 -11.272,-13.694 -9.646,-13.694 9.728,-13.694 11.354,-13.694 30.728,-13.694 32.354,-13.694 -32.272,-4.642 -30.646,-4.642 -11.272,-4.642 -9.646,-4.642 9.728,-4.642 11.354,-4.642 30.728,-4.642 32.354,-4.642 -32.272,-3.194 -30.646,-3.194 -11.272,-3.194 -9.646,-3.194 9.728,-3.194 11.354,-3.194 30.728,-3.194 32.354,-3.194 -32.272,5.858 -30.646,5.858 -11.272,5.858 -9.646,5.858 9.728,5.858 11.354,5.858 30.728,5.858 32.354,5.858 -32.272,7.306 -30.646,7.306 -11.272,7.306 -9.646,7.306 9.728,7.306 11.354,7.306 30.728,7.306 32.354,7.306 -32.272,16.358 -30.646,16.358 -11.272,16.358 -9.646,16.358 9.728,16.358 11.354,16.358 30.728,16.358 32.354,16.358 -32.272,17.806 -30.646,17.806 -11.272,17.806 -9.646,17.806 9.728,17.806 11.354,17.806 30.728,17.806 32.354,17.806 -32.272,26.858 -30.646,26.858 -11.272,26.858 -9.646,26.858 9.728,26.858 11.354,26.858 30.728,26.858 32.354,26.858 -32.272,28.306 -30.646,28.306 -11.272,28.306 -9.646,28.306 9.728,28.306 11.354,28.306 30.728,28.306 32.354,28.306 -32.298,37.043 -30.672,37.043 -11.298,37.043 -9.672,37.043 9.702,37.043 11.328,37.043 30.702,37.043 32.328,37.043 -32.298,38.49 -30.672,38.49 -11.298,38.49 -9.672,38.49 9.702,38.49 11.328,38.49 30.702,38.49 32.328,38.49
Out1.1: 58.+ U1.1.7 | length 6
  Top Copper w0.3: U1.1.7@-30.875,-38.25 -30.76,-38.365 -30.76,-39.015 -29.825,-39.95 -27.41,-39.95 -26.71,-39.25 58.+@-26.25,-39.25
Out1.2: 60.+ U1.2.7 | length 6
  Top Copper w0.3: U1.2.7@-9.875,-38.25 -9.76,-38.365 -9.76,-39.015 -8.825,-39.95 -6.41,-39.95 -5.71,-39.25 60.+@-5.25,-39.25
Out1.3: 62.+ U1.3.7 | length 6
  Top Copper w0.3: U1.3.7@11.125,-38.25 11.24,-38.365 11.24,-39.015 12.175,-39.95 14.59,-39.95 15.29,-39.25 62.+@15.75,-39.25
Out1.4: 64.+ U1.4.7 | length 6
  Top Copper w0.3: U1.4.7@32.125,-38.25 32.24,-38.365 32.24,-39.015 33.175,-39.95 35.59,-39.95 36.29,-39.25 64.+@36.75,-39.25
Out1.5: 50.+ U1.5.7 | length 6
  Top Copper w0.3: U1.5.7@-30.875,-27.75 -30.76,-27.865 -30.76,-28.515 -29.825,-29.45 -27.41,-29.45 -26.71,-28.75 50.+@-26.25,-28.75
Out1.6: 52.+ U1.6.7 | length 6
  Top Copper w0.3: U1.6.7@-9.875,-27.75 -9.76,-27.865 -9.76,-28.515 -8.825,-29.45 -6.41,-29.45 -5.71,-28.75 52.+@-5.25,-28.75
Out1.7: 54.+ U1.7.7 | length 6
  Top Copper w0.3: U1.7.7@11.125,-27.75 11.24,-27.865 11.24,-28.515 12.175,-29.45 14.59,-29.45 15.29,-28.75 54.+@15.75,-28.75
Out1.8: 56.+ U1.8.7 | length 6
  Top Copper w0.3: U1.8.7@32.125,-27.75 32.24,-27.865 32.24,-28.515 33.175,-29.45 35.59,-29.45 36.29,-28.75 56.+@36.75,-28.75
Out1.9: 42.+ U1.9.7 | length 6
  Top Copper w0.3: U1.9.7@-30.875,-17.25 -30.76,-17.365 -30.76,-18.015 -29.825,-18.95 -27.41,-18.95 -26.71,-18.25 42.+@-26.25,-18.25
Out1.10: 44.+ U1.10.7 | length 6
  Top Copper w0.3: U1.10.7@-9.875,-17.25 -9.76,-17.365 -9.76,-18.015 -8.825,-18.95 -6.41,-18.95 -5.71,-18.25 44.+@-5.25,-18.25
Out1.11: 46.+ U1.11.7 | length 6
  Top Copper w0.3: U1.11.7@11.125,-17.25 11.24,-17.365 11.24,-18.015 12.175,-18.95 14.59,-18.95 15.29,-18.25 46.+@15.75,-18.25
Out1.12: 48.+ U1.12.7 | length 6
  Top Copper w0.3: U1.12.7@32.125,-17.25 32.24,-17.365 32.24,-18.015 33.175,-18.95 35.59,-18.95 36.29,-18.25 48.+@36.75,-18.25
Out1.13: 34.+ U1.13.7 | length 6
  Top Copper w0.3: U1.13.7@-30.875,-6.75 -30.76,-6.865 -30.76,-7.515 -29.825,-8.45 -27.41,-8.45 -26.71,-7.75 34.+@-26.25,-7.75
Out1.14: 36.+ U1.14.7 | length 6
  Top Copper w0.3: U1.14.7@-9.875,-6.75 -9.76,-6.865 -9.76,-7.515 -8.825,-8.45 -6.41,-8.45 -5.71,-7.75 36.+@-5.25,-7.75
Out1.15: 38.+ U1.15.7 | length 6
  Top Copper w0.3: U1.15.7@11.125,-6.75 11.24,-6.865 11.24,-7.515 12.175,-8.45 14.59,-8.45 15.29,-7.75 38.+@15.75,-7.75
Out1.16: 40.+ U1.16.7 | length 6
  Top Copper w0.3: U1.16.7@32.125,-6.75 32.24,-6.865 32.24,-7.515 33.175,-8.45 35.59,-8.45 36.29,-7.75 40.+@36.75,-7.75
Out1.17: 26.+ U1.17.7 | length 6
  Top Copper w0.3: U1.17.7@-30.875,3.75 -30.76,3.635 -30.76,2.985 -29.825,2.05 -27.41,2.05 -26.71,2.75 26.+@-26.25,2.75
Out1.18: 28.+ U1.18.7 | length 6
  Top Copper w0.3: U1.18.7@-9.875,3.75 -9.76,3.635 -9.76,2.985 -8.825,2.05 -6.41,2.05 -5.71,2.75 28.+@-5.25,2.75
Out1.19: 30.+ U1.19.7 | length 6
  Top Copper w0.3: U1.19.7@11.125,3.75 11.24,3.635 11.24,2.985 12.175,2.05 14.59,2.05 15.29,2.75 30.+@15.75,2.75
Out1.20: 32.+ U1.20.7 | length 6
  Top Copper w0.3: U1.20.7@32.125,3.75 32.24,3.635 32.24,2.985 33.175,2.05 35.59,2.05 36.29,2.75 32.+@36.75,2.75
Out1.21: 18.+ U1.21.7 | length 6
  Top Copper w0.3: U1.21.7@-30.875,14.25 -30.76,14.135 -30.76,13.485 -29.825,12.55 -27.41,12.55 -26.71,13.25 18.+@-26.25,13.25
Out1.22: 20.+ U1.22.7 | length 6
  Top Copper w0.3: U1.22.7@-9.875,14.25 -9.76,14.135 -9.76,13.485 -8.825,12.55 -6.41,12.55 -5.71,13.25 20.+@-5.25,13.25
Out1.23: 22.+ U1.23.7 | length 6
  Top Copper w0.3: U1.23.7@11.125,14.25 11.24,14.135 11.24,13.485 12.175,12.55 14.59,12.55 15.29,13.25 22.+@15.75,13.25
Out1.24: 24.+ U1.24.7 | length 6
  Top Copper w0.3: U1.24.7@32.125,14.25 32.24,14.135 32.24,13.485 33.175,12.55 35.59,12.55 36.29,13.25 24.+@36.75,13.25
Out1.25: 10.+ U1.25.7 | length 6
  Top Copper w0.3: U1.25.7@-30.875,24.75 -30.76,24.635 -30.76,23.985 -29.825,23.05 -27.41,23.05 -26.71,23.75 10.+@-26.25,23.75
Out1.26: 12.+ U1.26.7 | length 6
  Top Copper w0.3: U1.26.7@-9.875,24.75 -9.76,24.635 -9.76,23.985 -8.825,23.05 -6.41,23.05 -5.71,23.75 12.+@-5.25,23.75
Out1.27: 14.+ U1.27.7 | length 6
  Top Copper w0.3: U1.27.7@11.125,24.75 11.24,24.635 11.24,23.985 12.175,23.05 14.59,23.05 15.29,23.75 14.+@15.75,23.75
Out1.28: 16.+ U1.28.7 | length 6
  Top Copper w0.3: U1.28.7@32.125,24.75 32.24,24.635 32.24,23.985 33.175,23.05 35.59,23.05 36.29,23.75 16.+@36.75,23.75
Out1.29: 2.+ U1.29.7 | length 6.2
  Top Copper w0.3: U1.29.7@-30.901,34.934 -30.901,34.449 -30.002,33.55 -27.41,33.55 -26.71,34.25 2.+@-26.25,34.25 ; U1.29.7@-30.875,35.25 -30.76,35.135 U1.29.7@-30.76,34.934
Out1.30: 4.+ U1.30.7 | length 6
  Top Copper w0.3: U1.30.7@-9.875,35.25 -9.76,35.135 -9.76,34.485 -8.825,33.55 -6.41,33.55 -5.71,34.25 4.+@-5.25,34.25
Out1.31: 6.+ U1.31.7 | length 6
  Top Copper w0.3: U1.31.7@11.125,35.25 11.24,35.135 11.24,34.485 12.175,33.55 14.59,33.55 15.29,34.25 6.+@15.75,34.25
Out1.32: 8.+ U1.32.7 | length 6
  Top Copper w0.3: U1.32.7@32.125,35.25 32.24,35.135 32.24,34.485 33.175,33.55 35.59,33.55 36.29,34.25 8.+@36.75,34.25
Out2.1: 57.+ U1.1.5 | length 4
  Top Copper w0.3: 57.+@-36.75,-39.25 -36.29,-39.25 -35.824,-38.784 -33.53,-38.784 -33.415,-38.669 U1.1.5@-33.415,-38.25
Out2.2: 59.+ U1.2.5 | length 4
  Top Copper w0.3: 59.+@-15.75,-39.25 -15.29,-39.25 -14.824,-38.784 -12.53,-38.784 -12.415,-38.669 U1.2.5@-12.415,-38.25
Out2.3: 61.+ U1.3.5 | length 4
  Top Copper w0.3: 61.+@5.25,-39.25 5.71,-39.25 6.176,-38.784 8.47,-38.784 8.585,-38.669 U1.3.5@8.585,-38.25
Out2.4: 63.+ U1.4.5 | length 4
  Top Copper w0.3: 63.+@26.25,-39.25 26.71,-39.25 27.176,-38.784 29.47,-38.784 29.585,-38.669 U1.4.5@29.585,-38.25
Out2.5: 49.+ U1.5.5 | length 4
  Top Copper w0.3: 49.+@-36.75,-28.75 -36.29,-28.75 -35.824,-28.284 -33.53,-28.284 -33.415,-28.169 U1.5.5@-33.415,-27.75
Out2.6: 51.+ U1.6.5 | length 4
  Top Copper w0.3: 51.+@-15.75,-28.75 -15.29,-28.75 -14.824,-28.284 -12.53,-28.284 -12.415,-28.169 U1.6.5@-12.415,-27.75
Out2.7: 53.+ U1.7.5 | length 4
  Top Copper w0.3: 53.+@5.25,-28.75 5.71,-28.75 6.176,-28.284 8.47,-28.284 8.585,-28.169 U1.7.5@8.585,-27.75
Out2.8: 55.+ U1.8.5 | length 4
  Top Copper w0.3: 55.+@26.25,-28.75 26.71,-28.75 27.176,-28.284 29.47,-28.284 29.585,-28.169 U1.8.5@29.585,-27.75